# Altium PCB ADSTM32-PCB-V1.PcbDoc
Units mm, origin at the board's own origin, x right, y up, seen from the top; angles counter-clockwise.
Board outline 43.87 x 25.43 mm, 4 copper layers (Top Layer, Int1 (GND), Int2 (PWR), Bottom Layer), stack 1.57 mm thick; 30 components, 26 nets, 137 pads, 42 vias.
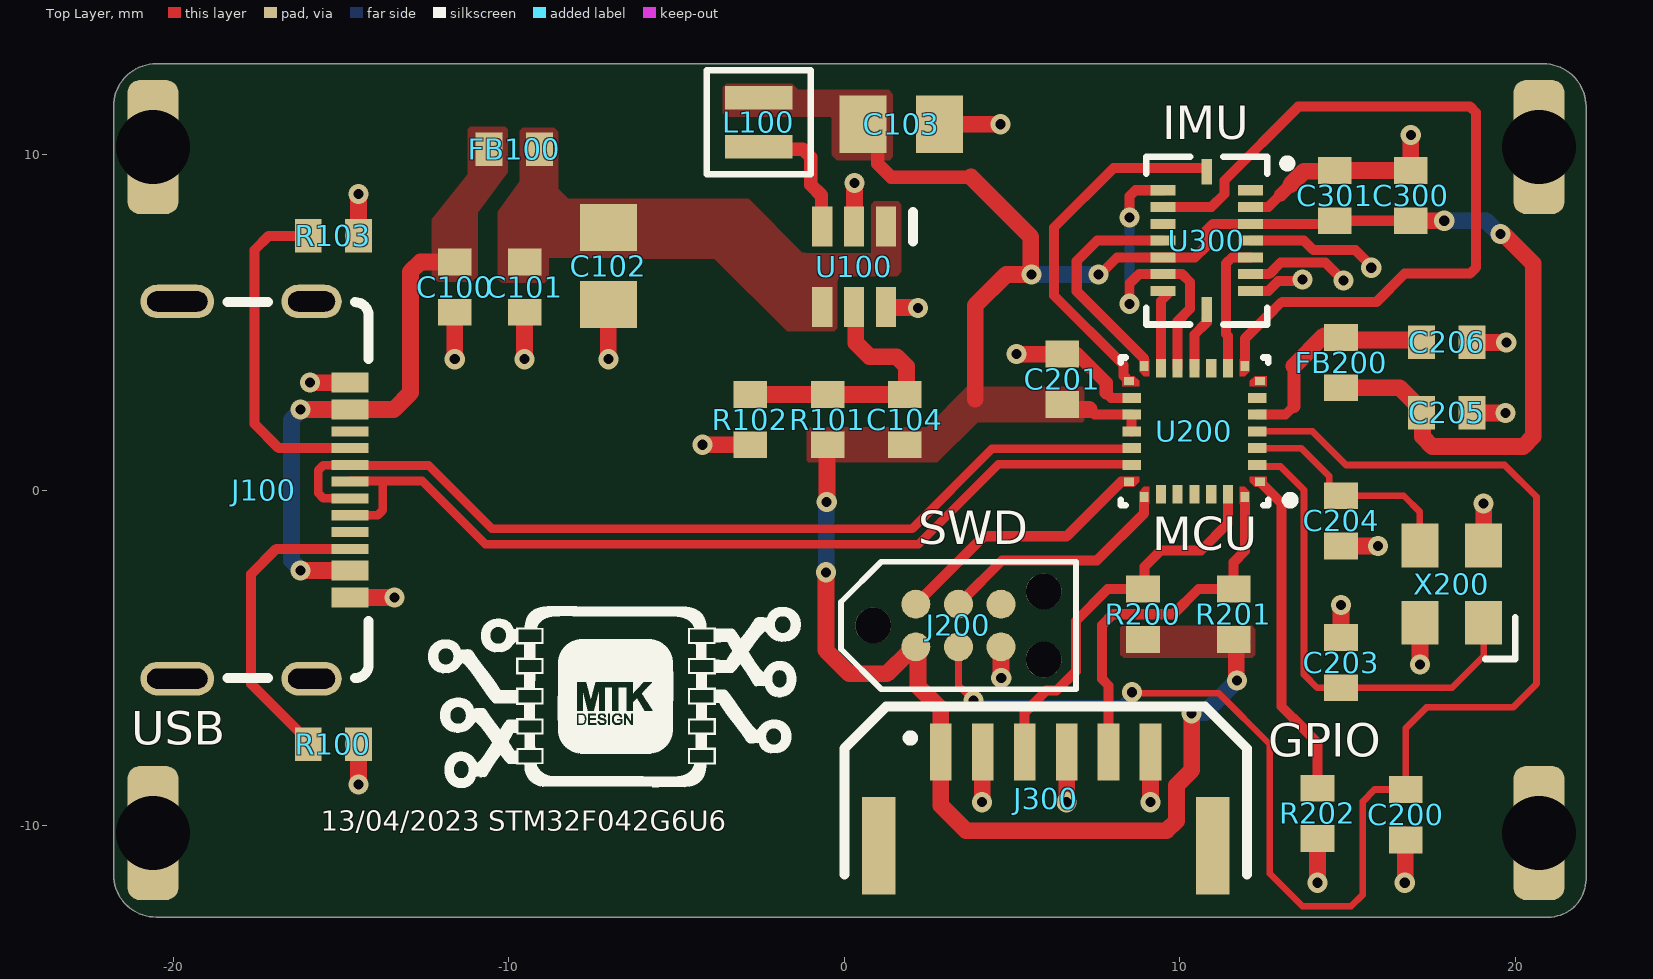
[diagram p0: Top Layer view]
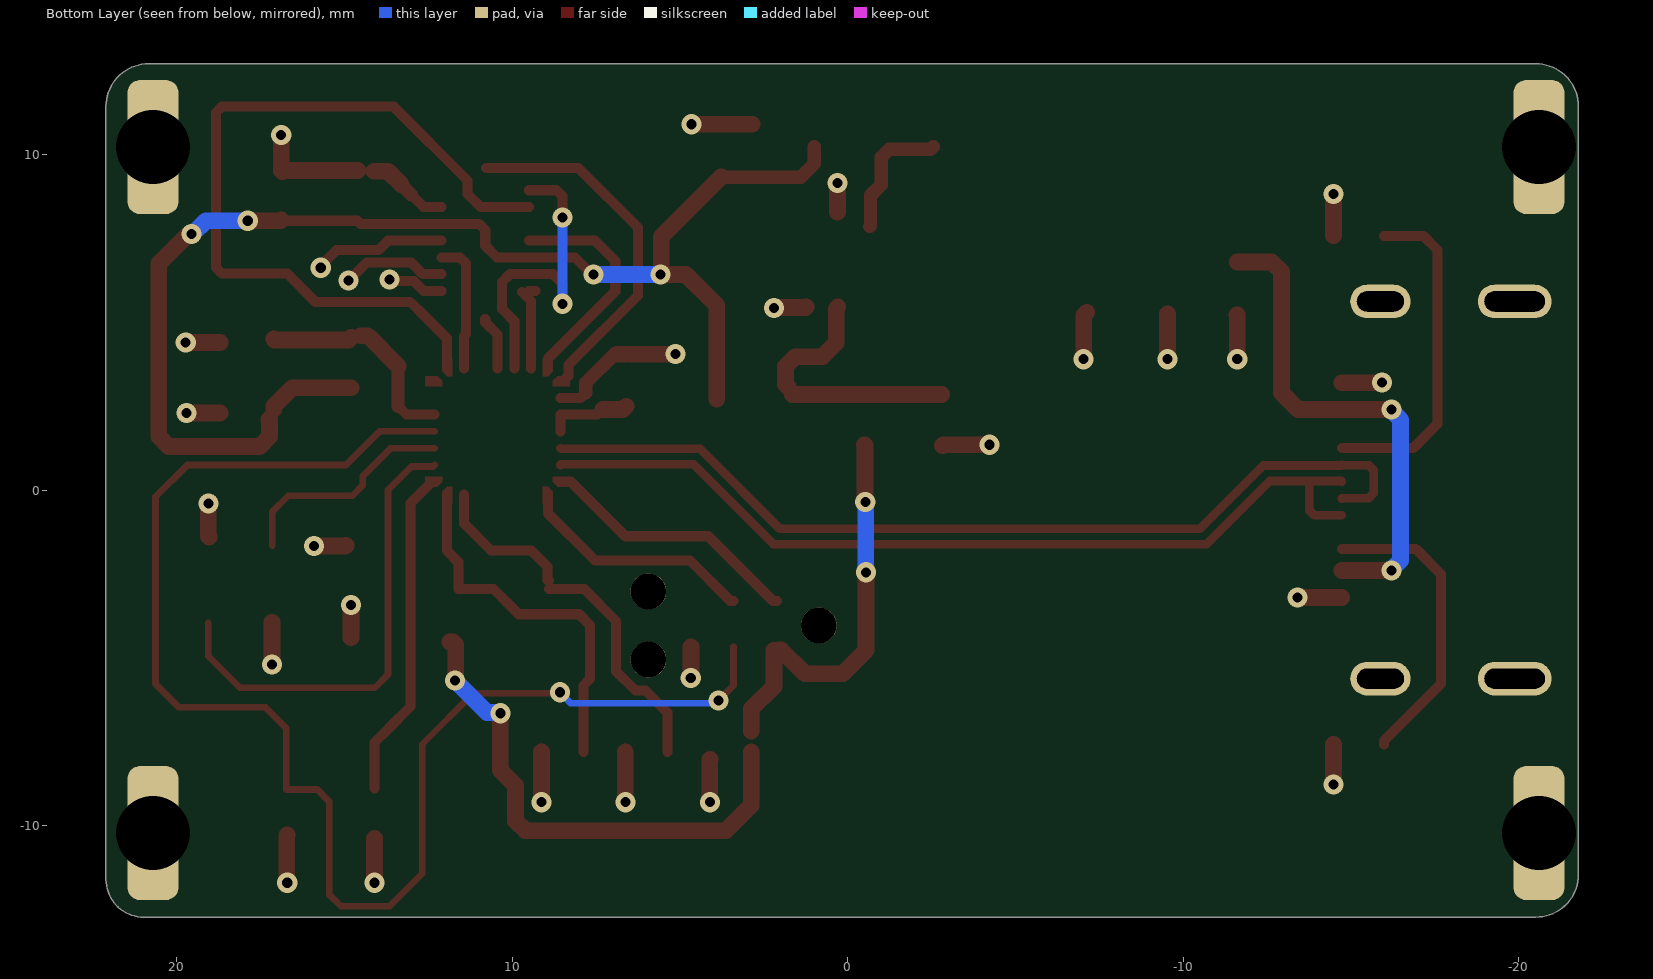
[diagram p1: Bottom Layer view, seen from below]
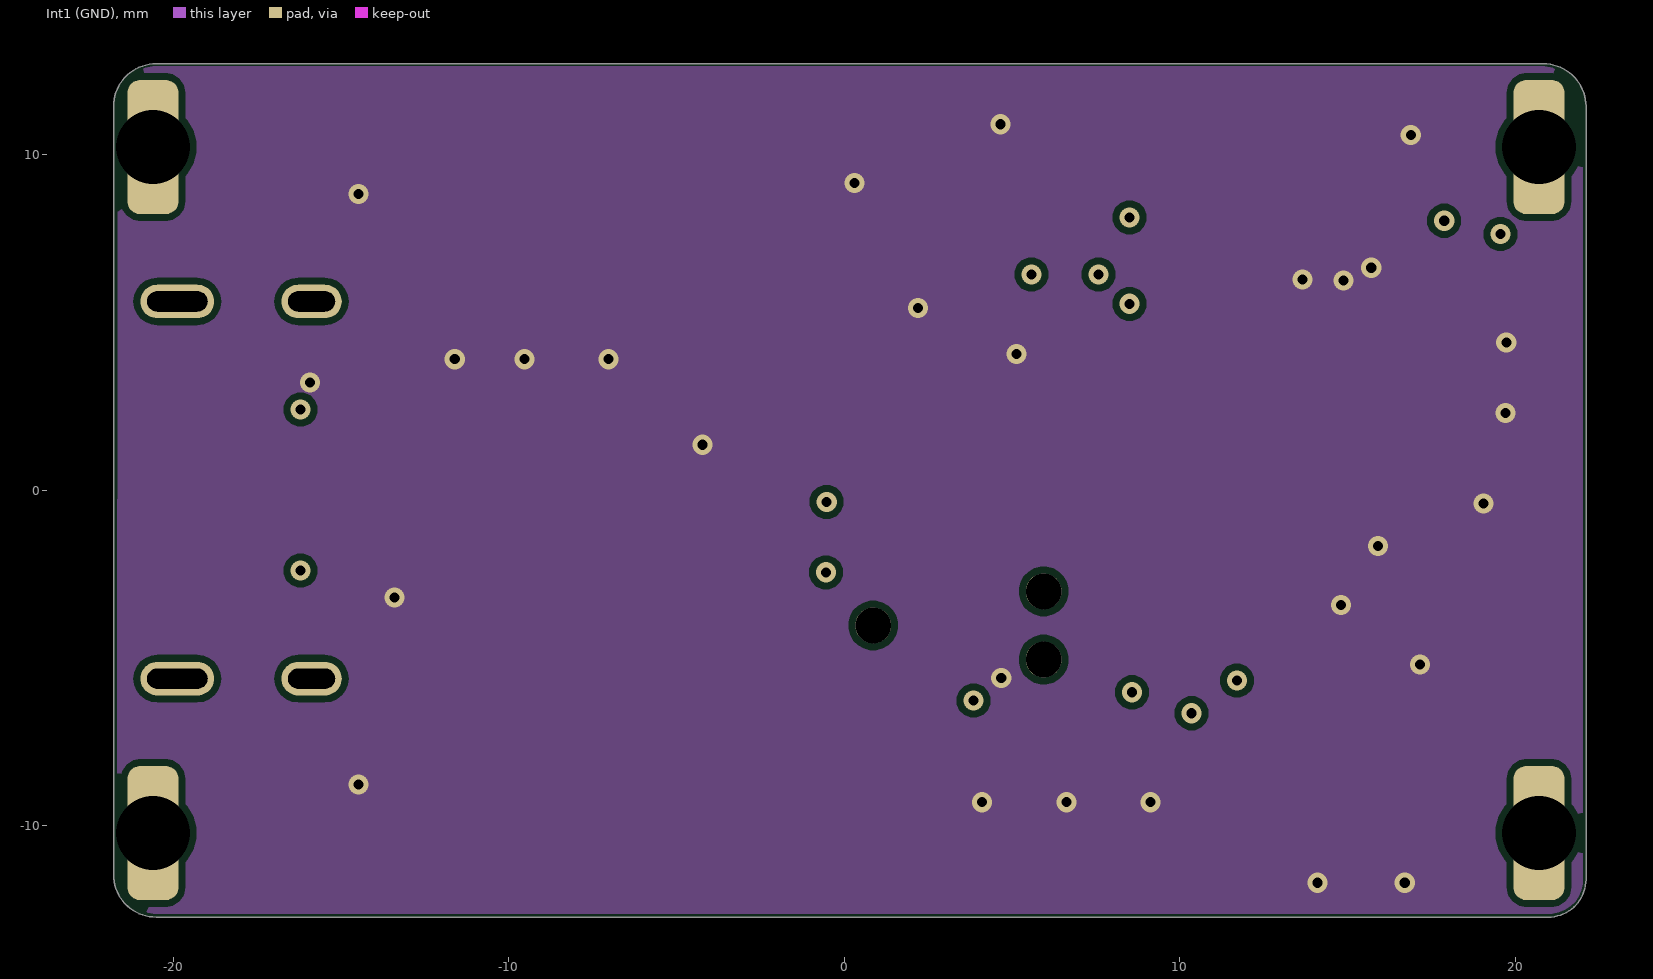
[diagram p2: Int1 (GND)]
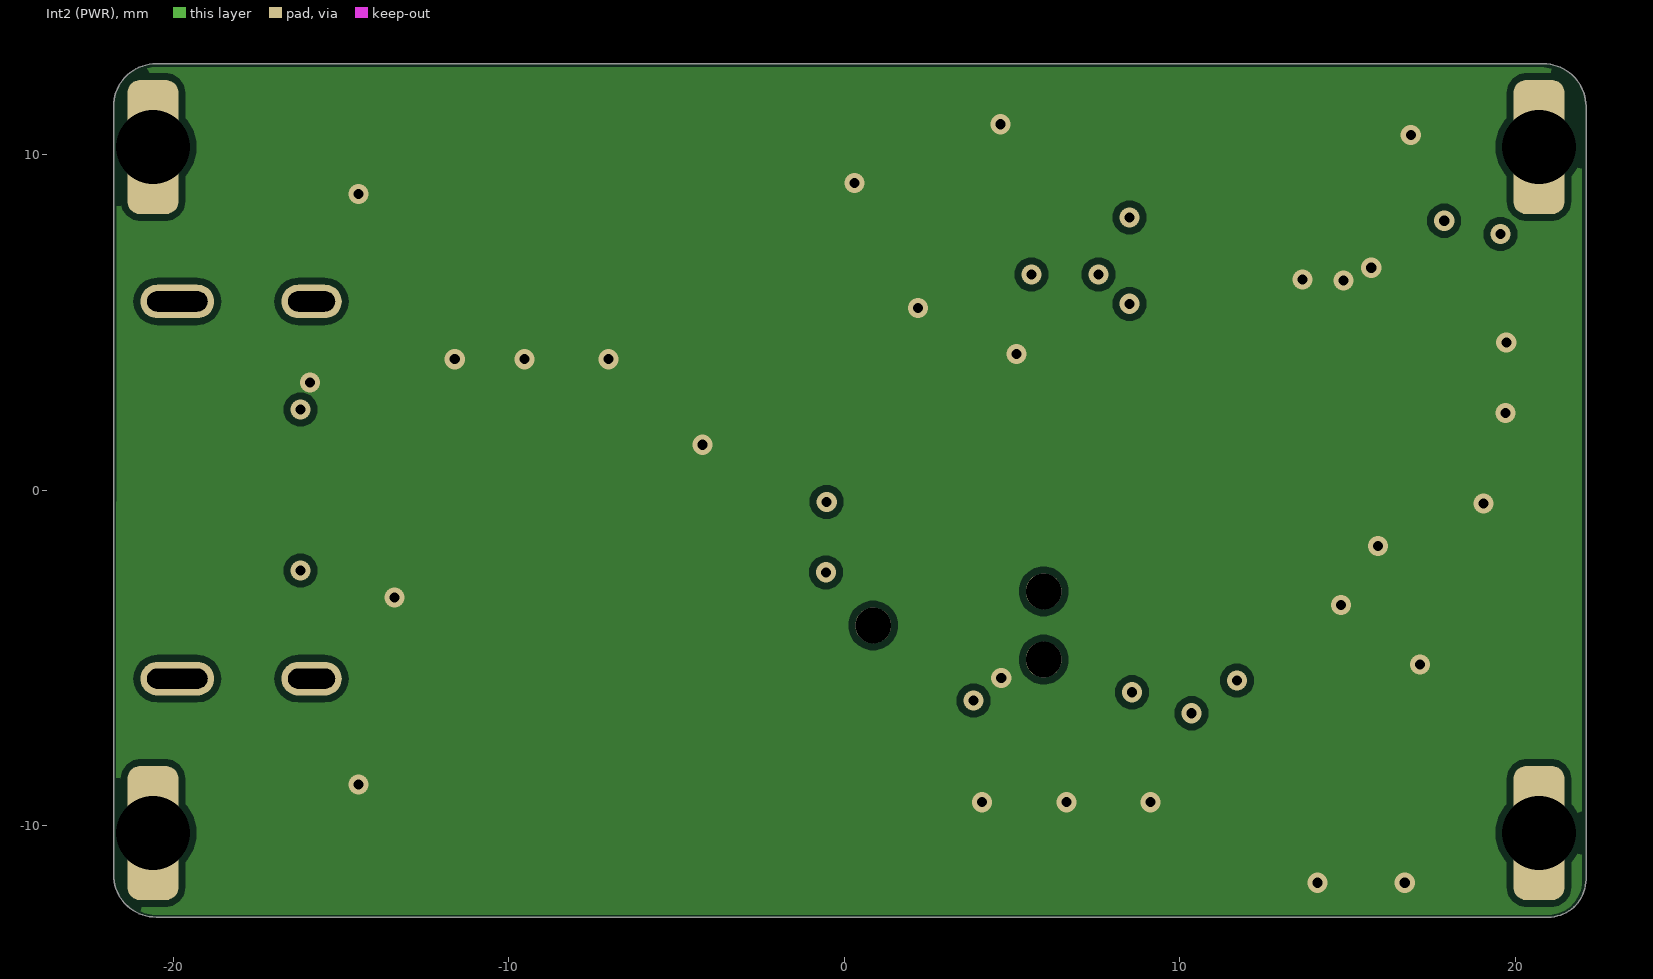
[diagram p3: Int2 (PWR)]
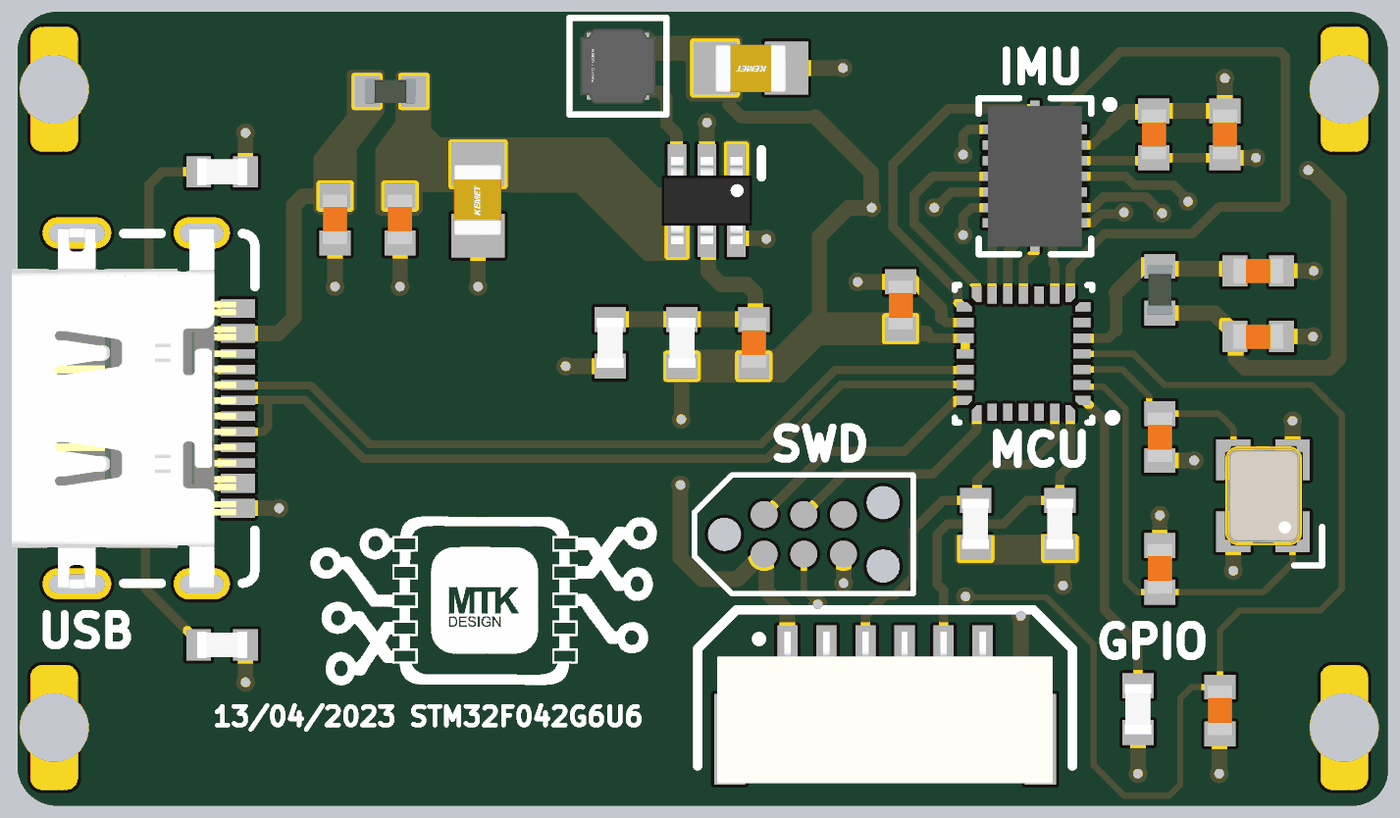
[diagram p4: 3D render of the assembled board from above, using the file's embedded part models]

## Layer stack, top to bottom
Top Solder: solder mask 0.0254, SM-001, Dk 4
Top Layer: signal copper 0.035
Dielectric 1: prepreg 0.2, PP-017, Dk 4.6
Int1 (GND): signal copper 0.0175
Dielectric 3: core 1.065, Core-039, Dk 4.6
Int2 (PWR): signal copper 0.0175
Dielectric 5: prepreg 0.2, PP-017, Dk 4.6
Bottom Layer: signal copper 0.035
Bottom Solder: solder mask 0.0254, SM-001, Dk 4

## Board outline
-20.505,-12.725 20.975,-12.725 ccw(c20.975,-11.6) 22.1,-11.6 22.1,11.43 ccw(c20.83,11.43) 20.83,12.7 -20.505,12.7 ccw(c-20.505,11.43) -21.775,11.43 -21.775,-11.455 ccw(c-20.505,-11.455)

## Design rules (kind name [scope] priority, off if disabled: settings)
Clearance [All] p1: gap=0.2 ignorepadtopadclearanceinfootprint=TRUE except(0: Arc-Hole Track-Hole SMDPad-Hole THPad-Hole Via-Hole Fill-Hole Poly-Hole Region-Hole Text-Hole)
DiffPairsRouting [All] p1: maxlimit=0.254 minlimit=0.203 mostfreqgap=0.254 toplayer_maxgap=0.203 toplayer_prefgap=0.203 toplayer_minwidth=0.26 toplayer_maxwidth=0.26 toplayer_prefwidth=0.26 bottomlayer_maxgap=0.203 bottomlayer_prefgap=0.203 bottomlayer_minwidth=0.26 bottomlayer_maxwidth=0.26 bottomlayer_prefwidth=0.26 impedanceprofiledriven=TRUE impedanceprofileid={B4E723D4-6B9C-4DB1-BE1E-399A26CC365E} impedanceprofilevalue=90.000000 maxuncoupledlength=12.7
PolygonConnect [All] p1: connectstyle=Direct reliefconductorwidth=0.254 reliefentries=4 polygonreliefangle="90 Angle" airgapwidth=0.254
RoutingVias [All] p1: holewidth=0.3 width=0.7 viastyle="Through Hole" minholewidth=0.25 minwidth=0.55 maxholewidth=0.4 maxwidth=0.9
SolderMaskExpansion [All] p1: expansion=0.102 istentingtop=FALSE
UnRoutedNet [All] p1: checkbadconnections=TRUE
Width [All] p1: maxlimit=1 minlimit=0.2 preferedwidth=0.3 minimp=50.000000 maximp=50.000000 favimp=50.000000
28 further rules are at their usual default settings.

## Classes and differential pairs
differential pair class USB: USB_D
differential pair USB_D: +USB_D_P -USB_D_N

## Components (designator, comment, footprint, x,y, rotation, side; value= is the part's Value field where it differs from the comment)
C100 "100n" CAP_0603 -11.608,6.05 r90 top
C101 "100n" CAP_0603 -9.528,6.05 r90 top
C102 "4u7" CAP_0805 -7.031,6.675 r90 top
C103 "4u7" CAP_0805 1.7,10.9 r180 top locked
C104 "22p" CAP_0603 1.8,2.1 r270 top
C200 "100n" CAP_0603 16.725,-9.675 r90 top
C201 "100n" CAP_0603 6.5,3.3 r270 top locked
C203 "10p" CAP_0603 14.8,-5.139 r270 top
C204 "10p" CAP_0603 14.8,-0.92 r90 top
C205 "100n" CAP_0603 17.949,2.3 r180 top
C206 "100n" CAP_0603 17.949,4.4 r180 top locked
C300 "100n" CAP_0603 16.879,8.775 r270 top
C301 "100n" CAP_0603 14.608,8.775 r270 top
FB100 "120R" FB_0603 -9.833,10.15 r0 top
FB200 "120R" FB_0603 14.8,3.8 r90 top locked
J100 "USB4510-03-1-A" USB4510-03-1-A -17.875,0 r270 top
J200 "TC2030-NL" TC2030-NL-FP 3.4,-4.035 r0 top
J300 "SM06B-GHS-TB" SM06B-GHS-TB 6,-9.2 r0 top
L100 "10u" FP-NRH2412-MFG -2.551,10.958 r90 top
R100 "5k1" RES_0603 -15.225,-7.575 r180 top
R101 "887k" RES_0603 -0.5,2.1 r270 top
R102 "280k" RES_0603 -2.8,2.1 r90 top
R103 "5k1" RES_0603 -15.225,7.575 r180 top
R200 "5k1" RES_0603 8.9,-3.7 r270 top
R201 "5k1" RES_0603 11.6,-3.7 r270 top
R202 "5k1" RES_0603 14.1,-9.634 r90 top
U100 "LTC3405ES6#TRMPBF" SOT-23-6 0.293,6.654 r180 top locked
U200 "STM32F042G6U6" STM-UFQFPN28_V 10.433,1.749 r180 top locked
U300 "BMI088" BMI088 10.8,7.433 r270 top locked
X200 "24MHz" XTAL_3225 18.1,-2.8 r90 top

## Footprints (in the part's own frame and the unit in brackets; to place one, negate y for a bottom-side part, rotate by r counter-clockwise, add the part's x,y. Pads: shape width x height; smd on the part's side, far side on the other; paste and mask are expansions set on the pad)
BMI088 [mm]
  rect 0.3x0.75 smd: 1(-1.5,1.3) 2(-1,1.3) 3(-0.5,1.3) 4(0,1.3) 5(0.5,1.3) 6(1,1.3) 7(1.5,1.3) 9(1.5,-1.3) 10(1,-1.3) 11(0.5,-1.3) 12(0,-1.3) 13(-0.5,-1.3) 14(-1,-1.3) 15(-1.5,-1.3)
  rect 0.75x0.3 smd: 8(2.05,0) 16(-2.05,0)
  silkscreen extent -2.5,-1.8 2.5,2.51, body extent -2.25,-1.5 2.25,1.5, height 1.01
CAP_0603 [mm]
  rect 0.8x1 smd: 1(-0.75,0) 2(0.75,0)
  body extent -0.8,-0.4 0.8,0.4, height 0.51
CAP_0805 [mm]
  rect 1.4x1.7 smd: 1(-1.143,0) 2(1.143,0)
  body extent -1.15,-0.76 1.15,0.79, height 1.01
FB_0603 [mm]
  rect 0.8x1 smd: 1(-0.75,0) 2(0.75,0)
  body extent -0.8,-0.4 0.8,0.4, height 0.81
FP-NRH2412-MFG [mm]
  rect 0.7x2 smd paste+0 mask+0: 1(-0.725,0) 2(0.725,0)
  silkscreen extent -1.55,-1.55 1.55,1.55, body extent -1.35,-1.35 1.35,1.35, height 0.25
RES_0603 [mm]
  rect 0.8x1 smd: 1(-0.75,0) 2(0.75,0)
  body extent -0.8,-0.43 0.8,0.43, height 0.52
SM06B-GHS-TB [mm]
  rect 0.65x1.7 smd: 1(-3.125,1.4) 2(-1.875,1.4) 3(-0.625,1.4) 4(0.625,1.4) 5(1.875,1.4) 6(3.125,1.4)
  rect 1x2.9 smd: ""(-4.975,-1.4) ""(4.975,-1.4)
  silkscreen extent -6,-2.25 6,2.75, body extent -5.38,-2.8 5.38,2.05, height 4.26
SOT-23-6 [mm]
  rect 0.6x1.2 smd: 1(-0.95,-1.2) 2(0,-1.2) 3(0.95,-1.2) 4(0.95,1.2) 5(0,1.2) 6(-0.95,1.2)
  silkscreen extent -1.75,-1.63 -1.75,-0.76, body extent -1.45,-1.4 1.45,1.4, height 1.45
STM-UFQFPN28_V [mm] "QFN, 28-Leads, Body 4.1x4.1mm, Pitch 0.5mm"
  rect 0.3x0.25 smd: 1(-1.95,1.5) 7(-1.95,-1.5) 15(1.95,-1.5) 21(1.95,1.5)
  rect 0.55x0.3 smd: 2(-1.875,1) 3(-1.875,0.5) 4(-1.875,0) 5(-1.875,-0.5) 6(-1.875,-1) 16(1.875,-1) 17(1.875,-0.5) 18(1.875,0) 19(1.875,0.5) 20(1.875,1)
  rect 0.25x0.3 smd: 8(-1.5,-1.95) 14(1.5,-1.95) 22(1.5,1.95) 28(-1.5,1.95)
  rect 0.3x0.55 smd: 9(-1,-1.875) 10(-0.5,-1.875) 11(0,-1.875) 12(0.5,-1.875) 13(1,-1.875) 23(1,1.875) 24(0.5,1.875) 25(0,1.875) 26(-0.5,1.875) 27(-1,1.875)
  Top Layer region: -2.15,-1.35 -1.65,-1.35 -1.65,-1.505 -1.795,-1.65 -2.15,-1.65
  Top Layer region: -1.35,-2.15 -1.35,-1.65 -1.505,-1.65 -1.65,-1.795 -1.65,-2.15
  Top Layer region: -1.35,2.15 -1.35,1.65 -1.505,1.65 -1.65,1.795 -1.65,2.15
  Top Layer region: 1.35,-2.15 1.35,-1.65 1.505,-1.65 1.65,-1.795 1.65,-2.15
  Top Layer region: 2.15,1.35 1.65,1.35 1.65,1.505 1.795,1.65 2.15,1.65
  Top Layer region: -2.15,1.35 -1.65,1.35 -1.65,1.505 -1.795,1.65 -2.15,1.65
  Top Layer region: 2.15,-1.35 1.65,-1.35 1.65,-1.505 1.795,-1.65 2.15,-1.65
  Top Layer region: 1.35,2.15 1.35,1.65 1.505,1.65 1.65,1.795 1.65,2.15
  silkscreen extent -2.98,-2.2 2.2,2.2, body extent -2.05,-2.05 2.05,2.05, height 0.6
TC2030-NL-FP [mil]
  round 33.98 smd: 1(-50,-25) 2(-50,25) 3(0,-25) 4(0,25) 5(50,-25) 6(50,25)
  round 42.01 hole 42.01 unplated: MH(-100,0) MH(100,-40) MH(100,40)
  silkscreen extent -138,-75 138,75
USB4510-03-1-A [mm]
  rect 0.6x1.1 smd: A1B12(-3.2,3.15) A4B9(-2.4,3.15) B1A12(3.2,3.15) B4A9(2.4,3.15)
  rect 0.3x1.1 smd: A5(-1.25,3.15) A6(-0.25,3.15) A7(0.25,3.15) A8(1.25,3.15) B5(1.75,3.15) B6(0.75,3.15) B7(-0.75,3.15) B8(-1.75,3.15)
  oval 1x1.8 hole 0.6 slot 1.4 at 90 deg: SH(-5.62,2) SH(5.62,2)
  oval 1x2.2 hole 0.6 slot 1.8 at 90 deg: SH(-5.62,-2) SH(5.62,-2)
  silkscreen extent -5.6,-0.5 5.6,3.7, body extent -5.77,-4.1 5.77,3.1, height 1.57
XTAL_3225 [mm]
  rect 1.3x1.1 smd: 1(-1.15,-0.95) 2(1.15,-0.95) 3(1.15,0.95) 4(-1.15,0.95)
  silkscreen extent -2.23,-1.89 -1,-1, body extent -1.6,-1.28 1.6,1.22, height 0.61

## Part data
C100 C101 C104 C200 C201 C203 C204 C205 C206 C300 C301: library part CAP_0603_16V, "Capacitor SMD 0603 16V"
C102 C103: library part CAP_0805_16V, "Capacitor SMD 0805 16V"
FB100 FB200: library part FB_0603, "Ferrite Bead SMD 0603"
J100: "USB Connector Type C SMT Mid-Mount 16 Pin", Manufacturer=GCT, Manufacturer Part Number=USB4510-03-1-A
J200: "Tag-Connect No-Solder SWD Debug Connector (No Legs) DO NOT PLACE", Manufacturer=Tag-Connect, Manufacturer Part Number=TC2030-NL-FP
J300: "Header Connector 6 Position 1.25MM Pitch SMD Horizontal JST GH", Manufacturer=JST, Manufacturer Part Number=SM06B-GHS-TB
L100: library part CMP-14484-000582-1, "Shielded Wirewound Inductor 10uH 20% 0.51A 0.72Ω SMD", Case/Package=Nonstandard, Current Rating=450mA, DC Resistance (DCR)=600mR, Inductance=10uH, Max DC Current=810mA, Max Operating Temperature=120°C, Min Operating Temperature=-25°C, Package Quantity=2500, Self Resonant Frequency=29MHz, Test Frequency=100kHz, Tolerance=20%, Core Material=Ferrite, Halogen Free="Halogen Free", Height=1.2mm, Height - Seated (Max)=0.047inch, Length=0.095inch, Mount="Surface Mount", Packaging="Tape and Reel", RoHS Compliant=Yes, Saturation Current=810mA, Shielding=Shielded, Termination=SMD/SMT, Width=0.095inch
R100 R101 R102 R103 R200 R201 R202: library part RES_0603, "Resistor SMD 0603"
U100: "1.5MHz, 300mA / Synchronous Step-Down / Regulator in ThinSOT", Manufacturer="Analog Devices", Manufacturer Part Number=LTC3405ES6#TRMPBF
U200: library part CMP-0304-00112-2, "ARM Cortex-M0 32-bit MCU, 32 KB Flash, 6 KB Internal RAM, 24 I/Os, 28-Pin UFQFPN, -40 to 85 degC, Tray", I/Os (High Current)=24, Manufacturer=STMicroelectronics, Operating Frequency(F) (Processor speed) (MHz)=48, Package Description="28-Pin Ultra Thin Fine Pitch Quad Flat No-Lead, 4 x 4 x 0.6 mm Body, 0.5 mm Pitch", Package Reference=UFQFPN28, Supply Voltage(Vcc) min (V)=2, ComponentLink1Description="Manufacturer URL", ComponentLink1URL=http://www.st.com/, ComponentLink2Description=Datasheet, ComponentLink2URL=http://www.st.com/st-web-ui/static/active/en/resource/technical/document/datasheet/DM00105814.pdf, Core="ARM Cortex-M0", DatasheetVersion="Rev. 5", FLASH Size (Prog) (kB)=32, Internal RAM Size (kB)=6, Mounting Technology="Surface Mount", Packing=Tray, PartNumber=STM32F042G6U6
U300: "Inertial Measurement Unit IMU 6-Axis LGA", Manufacturer=Bosch, Manufacturer Part Number=BMI088
X200: library part TSX-3225_24.0000MF15X-AC, "Crystal SMD 24MHz 10PPM 7pF 3225", Load Capacitance=7pF, Manufacturer=Epson, Manufacturer Number="TSX-3225 24.0000MF15X-AC", ESR=40R, Type=XTAL

## Free pads (board coordinates)
  rrect50% 1.524x4 hole 2.2: MH(-20.6,-10.22) MH(-20.6,10.22) MH(20.7,-10.22) MH(20.7,10.22)

## Via types
v1: diameter 0.6, hole 0.3, Top Layer to Bottom Layer, tented both sides, 42 vias

## Nets (pads, with @x,y where several pads share a name; then routed paths per layer and width w, separated by ;. In a path a pad name is that pad's centre, name@x,y a point inside that pad or via, vN(x,y) a via of type N, cw(c..) or ccw(c..) an arc to the next point about the centre after c; other vN are vias at no path point)
+3V3: C103.2 C104.2 C201.2 C205.2 C300.2 C301.2 FB200.1 J200.1 J300.1 L100.2 R101.2 R200.2 R201.2 U200.17 U200.18 U300.3 U300.11 | length 70.2
  Top Layer w0.3: 7.3,2.4 7.451,2.249 U200.17 U200.18 ; v1(7.575,6.425) 7.619,6.425 8.127,6.933 U300.11 10.449,6.933 10.8,7.284 10.8,7.75 10.983,7.933 U300.3 14.516,7.933 C301.2 16.854,8.025 C300.2@16.879,8.05
  Top Layer w0.4: C103.2@1,10.225 1,9.725 1.4,9.325 3.775,9.325
  Top Layer w0.5: v1(-0.55,-2.45) -0.55,-4.775 0.15,-5.475 1.264,-5.475 1.981,-4.758 2.033,-4.758 J200.1@2.05,-4.775 ; v1(-0.525,-0.35) -0.512,-0.337 -0.512,1.337 R101.2 ; J200.1@2.199,-4.775 2.199,-5.849 2.875,-6.525 J300.1@2.875,-7.175 ; J300.1 2.875,-9.4 3.625,-10.15 9.607,-10.15 9.9,-9.857 9.9,-8.8 10.35,-8.35 v1(10.35,-6.65) v1@10.35,-6.604 ; 3.775,9.325 5.556,7.544 5.556,6.444 v1(5.575,6.425) 4.825,6.425 3.9,5.5 3.9,2.704 ; C201.2@6.6,2.5 6.7,2.4 7.3,2.4 ; v1(11.7,-5.675) 11.681,-5.656 11.681,-4.6 11.756,-4.525 R201.2@11.85,-4.525 ; FB200.1 16.549,3.05 17.1,2.499 C205.2@17.1,2.4 ; C300.2@16.879,8.05 16.904,8.025 v1(17.875,8.025) ; C205.2@17.25,2.1 17.225,2.075 17.225,1.593 17.518,1.3 20.232,1.3 20.525,1.593 20.525,6.75 19.669,7.606 19.569,7.606 v1(19.55,7.625)
  Bottom Layer w0.5: v1(-0.55,-2.45) -0.537,-2.438 -0.537,-0.362 v1(-0.525,-0.35) ; v1(5.575,6.425) v1@7.5,6.425 ; v1(10.35,-6.65) 10.369,-6.631 10.744,-6.631 v1@11.675,-5.7 ; v1(17.875,8.025) 19.123,8.025 19.523,7.625 v1(19.55,7.625)
+3V3A: C206.2 FB200.2 U200.5 | length 6.2
  Top Layer w0.3: U200.5 13.149,2.249 13.4,2.5
  Top Layer w0.4: 13.4,2.5 13.4,3.7
  Top Layer w0.5: 13.4,3.7 14.3,4.6 FB200.2@14.5,4.6 ; FB200.2 14.875,4.475 17.075,4.475 C206.2@17.1,4.5
+5V: C101.2 C102.2 FB100.2 U100.1 U100.4
+VUSB: C100.2 FB100.1 J100.A4B9 J100.B4A9 | length 15
  Top Layer w0.5: v1(-16.2,-2.4) J100.B4A9 ; v1(-16.2,2.4) J100.A4B9 -13.425,2.4 -12.925,2.9 -12.925,6.507 -12.632,6.8 C100.2
  Bottom Layer w0.5: v1(-16.2,-2.4) -16.2,-2.373 -16.475,-2.098 -16.475,2.098 -16.2,2.373 v1(-16.2,2.4)
BOOT0: R202.2 U200.1 | length 9.8
  Top Layer w0.3: U200.1 13.025,-0.393 13.025,-6.45 13.675,-7.1 ; 13.7,-7.125 14.1,-7.525 R202.2
BUCK_SW: L100.1 U100.3 | length 3.9
  Top Layer w0.4: L100.1 -2.469,10.151 -1.234,10.151 -1,9.917 -1,9.1 -0.679,8.779 -0.679,7.876 U100.3
BUCK_VFB: C104.1 R101.1 R102.2 U100.5 | length 8
  Top Layer w0.5: R102.2 R101.1 C104.1@1.65,2.85 ; U100.5 0.343,5.404 0.343,4.382 0.75,3.975 1.557,3.975 1.85,3.682 1.85,3.15 C104.1@1.775,3.075
GND: C100.1 C101.1 C102.1 C103.1 C200.1 C201.1 C203.1 C204.1 C205.1 C206.1 C300.1 C301.1 J100.A1B12 J100.B1A12 J200.5 J300.2 J300.4 J300.6 R100.1 R102.1 R103.1 R202.1 U100.2 U100.6 U200.16 U300.2 U300.4 U300.6 U300.7 X200.2 X200.4 | length 46.8
  Top Layer w0.3: C201.1 6.55,4.05 C201.1@6.65,3.95 ; 7.8,2.9 7.951,2.749 U200.16 ; U300.7 12.633,5.933 12.925,6.225 13.6,6.225 v1(13.65,6.275) ; U300.6 12.658,6.433 13,6.775 14.339,6.775 14.772,6.343 14.843,6.343 v1@14.875,6.375 ; U300.4 13.692,7.433 13.975,7.15 15.225,7.15 15.7,6.675 v1(15.7,6.625) ; U300.2 12.633,8.433 13,8.8
  Top Layer w0.4: C201.1@6.95,4.05 7.8,3.2 7.8,2.9 ; 13,8.8 13.3,9.1
  Top Layer w0.5: v1(-15.925,3.2) J100.A1B12 ; J100.B1A12 v1(-13.4,-3.2) ; v1(-14.475,-8.775) R100.1 ; R103.1 v1(-14.475,8.825) ; v1@-11.608,3.9 -11.608,5.217 C100.1@-11.6,5.225 ; v1(-9.528,3.9) -9.528,5.247 C101.1@-9.525,5.25 ; C102.1@-7.125,5.3 -7.031,5.206 v1(-7.031,3.9) ; v1(-4.225,1.35) -2.85,1.35 R102.1@-2.825,1.325 ; U100.2@0.3,8.275 v1(0.3,9.15) ; U100.6 1.258,5.439 2.189,5.439 v1@2.2,5.45 ; C103.1 v1(4.65,10.9) ; v1(4.1,-9.3) 4.112,-9.288 4.112,-8.037 J300.2@4.1,-8.025 ; J200.5 4.673,-4.673 4.673,-5.597 v1(4.675,-5.6) ; v1(5.125,4.05) C201.1 ; v1(6.625,-9.3) J300.4 ; C201.1@6.65,4.05 C201.1@6.875,4.05 ; v1@9.125,-9.25 J300.6 ; 13.3,9.1 13.7,9.5 C301.1@14.112,9.5 ; v1@14.075,-11.65 14.1,-11.625 R202.1 ; C301.1 16.808,9.525 C300.1@16.844,9.489 ; v1@14.775,-3.4 v1(14.8,-3.425) C203.1 ; C204.1@14.95,-1.65 14.97,-1.67 v1(15.9,-1.67) ; v1(16.7,-11.7) 16.712,-11.688 16.712,-10.288 C200.1@16.7,-10.275 ; C300.1 v1(16.879,10.575) ; v1@17.15,-5.125 X200.4 ; C205.1 19.654,2.3 19.675,2.321 v1@19.675,2.325 ; C206.1 19.65,4.4 v1@19.675,4.425 ; X200.2@19.025,-1.4 19.05,-1.375 v1(19.05,-0.4)
  other v1: 14.1,-11.7 9.125,-9.3 17.15,-5.2 19.7,2.3 -11.608,3.9 19.725,4.4 2.2,5.424 14.875,6.25
I2C_SCL: J300.3 R200.1 U200.27 | length 11.5
  Top Layer w0.3: J300.3 5.375,-6.625 6.025,-5.975 6.325,-5.975 6.9,-5.4 6.9,-3.9 7.85,-2.95 R200.1 ; R200.1@8.9,-2.7 8.949,-2.7 8.949,-2.276 9.425,-1.8 10.625,-1.8 11.433,-0.992 U200.27
I2C_SDA: J300.5 R201.1 U200.28 | length 11.1
  Top Layer w0.3: J300.5 7.875,-5.825 7.675,-5.625 7.675,-4.025 8,-3.7 9.8,-3.7 10.55,-2.95 R201.1 11.6,-2.15 11.933,-1.817 U200.28
IMU_CSB_ACCEL: U200.8 U300.14 | length 24
  Top Layer w0.3: U300.14 10.933,8.433 11.325,8.825 11.325,9.225 13.525,11.425 18.649,11.425 18.825,11.249 18.825,6.626 18.649,6.45 16.7,6.45 15.85,5.6 13.05,5.6 ; U200.8 11.933,4.508 12.65,5.225 13,5.575
IMU_CSB_GYRO: U200.9 U300.5 | length 3.9
  Top Layer w0.3: 11.375,4.65 11.433,4.592 U200.9 ; 11.375,4.675 11.375,6.758 11.551,6.933 U300.5
IMU_INT1: U200.14 U300.12 | length 6.8
  Top Layer w0.3: U200.14 8.933,3.917 6.925,5.925 6.925,6.825 7.533,7.433 U300.12
IMU_INT2: U200.15 U300.16 | length 10.8
  Top Layer w0.3: U200.15 8.325,3.407 8.325,3.725 6.25,5.8 6.25,7.825 8.025,9.6 U300.16@10.775,9.6
IMU_MISO: U200.12 U300.10 U300.15 | length 9.5
  Top Layer w0.3: v1(8.5,5.55) 8.5,6.15 8.783,6.433 U300.10 10.067,6.433 10.3,6.2 10.3,5.4 9.933,5.033 U200.12 ; v1(8.5,8.125) v1@8.557,8.182 ; v1@8.5,8.3 8.5,8.758 8.676,8.933 U300.15
  Bottom Layer w0.3: v1(8.5,5.55) v1@8.5,8.1
IMU_MOSI: U200.13 U300.9 | length 2.6
  Top Layer w0.3: U300.9@9.3,5.933 U300.9 ; U200.13 9.433,5.633 U300.9@9.7,5.9
IMU_SCK: U200.11 U300.8 | length 1.6
  Top Layer w0.3: U200.11 10.433,4.633 10.8,5 U300.8@10.8,5.1
NRST: C200.2 J200.3 U200.4 | length 43.9
  Top Layer w0.2: J200.3 3.4,-5.825 v1(3.85,-6.275) ; v1@8.375,-6.05 11.15,-6.05 12.675,-7.575 12.675,-11.425 13.65,-12.4 15.1,-12.4 15.45,-12.05 15.45,-9.275 15.8,-8.925 C200.2 16.725,-7.1 17.35,-6.475 19.925,-6.475 20.625,-5.775 20.625,-5.35 ; U200.4 13.951,1.749 14.95,0.75 19.675,0.75 20.625,-0.2 20.625,-5.325
  Bottom Layer w0.2: v1(3.85,-6.275) 3.925,-6.35 8.258,-6.35 8.575,-6.033 v1(8.575,-6.025)
OSC_IN: C203.2 U200.2 X200.1 | length 14.1
  Top Layer w0.2: U200.2 12.357,0.7 13,0.7 13.7,0 13.7,-5.5 14.089,-5.889 C203.2 18.111,-5.889 19.05,-4.95 X200.1
OSC_OUT: C204.2 U200.3 X200.3 | length 6.8
  Top Layer w0.2: U200.3 13.613,1.249 14.453,0.408 14.453,0.13 14.753,-0.17 15.031,-0.17 16.67,-0.17 17.15,-0.65 X200.3
SWCLK: J200.4 U200.22 | length 7.1
  Top Layer w0.3: J200.4@3.4,-3.3 3.5,-3.3 4.7,-2.1 7.525,-2.1 8.933,-0.692 U200.22
SWDIO: J200.2 U200.21 | length 7.9
  Top Layer w0.3: J200.2@2.1,-3.3 2.23,-3.3 4.155,-1.375 6.625,-1.375 8.249,0.249 U200.21
USB_CC1: J100.A5 R103.2 | length 10.1
  Top Layer w0.3: R103.2 -17.15,7.575 -17.575,7.15 -17.575,1.975 -16.85,1.25 J100.A5
USB_CC2: J100.B5 R100.2 | length 9
  Top Layer w0.3: R100.2 -15.975,-7.475 -17.675,-5.775 -17.675,-2.5 -16.925,-1.75 J100.B5
USB_D_N: J100.A7 J100.B7 U200.19 | length 27.8
  Top Layer w0.26: J100.A7 -14.734,-0.241 -15.523,-0.241 -15.675,-0.089 -15.675,0.589 -15.523,0.741 -14.734,0.741 J100.B7 -14.707,0.732 -12.382,0.732 -10.5,-1.15 2.02,-1.15 4.4,1.23 8.54,1.23 U200.19
USB_D_P: J100.A6 J100.B6 U200.20 | length 27
  Top Layer w0.26: J100.B6 -13.902,-0.75 -13.75,-0.598 -13.75,0.268 ; J100.A6 -14.707,0.268 -13.75,0.268 ; U200.20 8.54,0.767 4.592,0.767 2.212,-1.613 -10.692,-1.613 -12.574,0.268 -13.75,0.268
pads on no net: J100.A8 J100.B8 J100.SH J200.6 J200.MH J300. U200.6 U200.7 U200.10 U200.23 U200.24 U200.25 U200.26 U300.1 U300.13

## Polygon pours and split planes (outlines as drawn)
+3V3 on Top Layer "+3V3_L01_P008" (solid, remove dead copper, pour order 8): 9.875,-4.04 9.835,-4.04 9.825,-4.05 8.275,-4.05 8.225,-4.1 8.225,-4.9 8.325,-5 12.15,-5 12.25,-4.9 12.25,-4.05 12.225,-4.025
+3V3 on Top Layer "+3V3_L01_P007" (solid, remove dead copper, pour order 7): -1.125,0.875 -1.125,1.825 -1.075,1.875 2.45,1.875 3.65,3.075 7.1,3.075 7.15,3.025 7.15,2.075 7.1,2.025 3.975,2.025 2.775,0.825 -1.075,0.825
+5V on Top Layer "+5V_L01_P005" (solid, remove dead copper, pour order 5): -1.7,4.725 -1.725,4.75 -3.875,6.9 -6,6.9 -6.025,6.925 -6.025,8.675 -2.85,8.675 -1.25,7.075 0.8,7.075 0.8,8.525 0.875,8.6 1.625,8.6 1.7,8.525 1.7,6.5 1.575,6.375 -0.1,6.375 -0.2,6.275 -0.2,4.825 -0.3,4.725
+5V on Top Layer "+5V_L01_P000" (solid, remove dead copper, pour order 0): -10.197,6.175 -8.925,6.175 -8.8,6.3 -8.8,6.925 -7.925,6.925 -6.05,6.925 -5.925,7.05 -5.925,8.6 -6,8.675 -8.225,8.675 -8.525,8.975 -8.525,10.675 -8.65,10.8 -9.575,10.8 -9.675,10.7 -9.675,9.2 -10.325,8.3 -10.325,6.289
+3V3 on Top Layer "+3V3_L01_P003" (solid, remove dead copper, pour order 3): -3.625,12 -3.525,12.1 -1.55,12.1 -1.375,11.925 1.325,11.925 1.45,11.8 1.45,9.925 1.35,9.825 -0.225,9.825 -0.375,9.975 -0.375,11.075 -0.425,11.125 -3.525,11.125 -3.625,11.225
+VUSB on Top Layer "+VUSB_L01_P002" (solid, remove dead copper, pour order 2): -12.3,6.425 -12.3,6.325 -12.1,6.2 -11.1,6.2 -10.925,6.375 -10.925,8.267 -10.025,9.467 -10.025,10.75 -10.1,10.825 -11.15,10.825 -11.225,10.75 -11.225,9.415 -12.3,8.068
GND on Int1 (GND) "GND_L02_P009" (solid, remove dead copper, pour order 9): -21.65,7.925 -21.65,11.475 cw(c-20.5,11.475) -20.5,12.625 20.75,12.625 cw(c20.75,11.375) 22,11.375 22,-11.625 cw(c21,-11.625) 21,-12.625 -20.475,-12.625 cw(c-20.475,-11.425) -21.675,-11.425
GND on Int2 (PWR) "GND_L03_P010" (solid, remove dead copper, pour order 10): -21.675,7.9 -21.675,11.45 cw(c-20.525,11.45) -20.525,12.6 20.725,12.6 cw(c20.725,11.35) 21.975,11.35 21.975,-11.65 cw(c20.975,-11.65) 20.975,-12.65 -20.5,-12.65 cw(c-20.5,-11.45) -21.7,-11.45

## Silkscreen, mask and mechanical layers (free items; w line width, h text height)
Top Overlay:
  drawing of 3 lines, arcs and shapes, not listed
  text "IMU" at 9.479,10.454 h1
  text "SWD" at 2.204,-1.621 h1
  text "MCU" at 9.179,-1.796 h1
  text "USB" at -21.246,-7.596 h1
  text "GPIO" at 12.629,-7.946 h1
  text "13/04/2023 STM32F042G6U6" at -15.6,-10.15 h0.6
Mechanical 1:
  lines w0.2: -20.55,12.7 -19.65,12.7 ; -20.505,12.7 ccw(c-20.505,11.43) -21.775,11.43 -21.775,-11.455 ccw(c-20.505,-11.455) -20.505,-12.725 -19.65,-12.725 ; -19.625,-12.725 19.68,-12.725 ; -19.625,12.7 19.68,12.7 ; 19.675,-12.725 20.975,-12.725 ccw(c20.975,-11.6) 22.1,-11.6 22.1,11.43 ccw(c20.83,11.43) 20.83,12.7 ; 19.675,12.7 20.9,12.7

## Text inside footprints (layer, text, board x,y; h text height)
J100: Mechanical 13 "PCB EDGE" at -21.25,1.016 h0.25 r270